# Altium PCB ZB.PcbDoc
Units mil, origin at the board's own origin, x right, y up, seen from the top; angles counter-clockwise.
Board outline 4491 x 3636 mil, 2 copper layers (Top Layer, Bottom Layer); 40 components, 58 nets, 193 pads, 17 vias.
Unrouted connection lines stored in the file: 4.
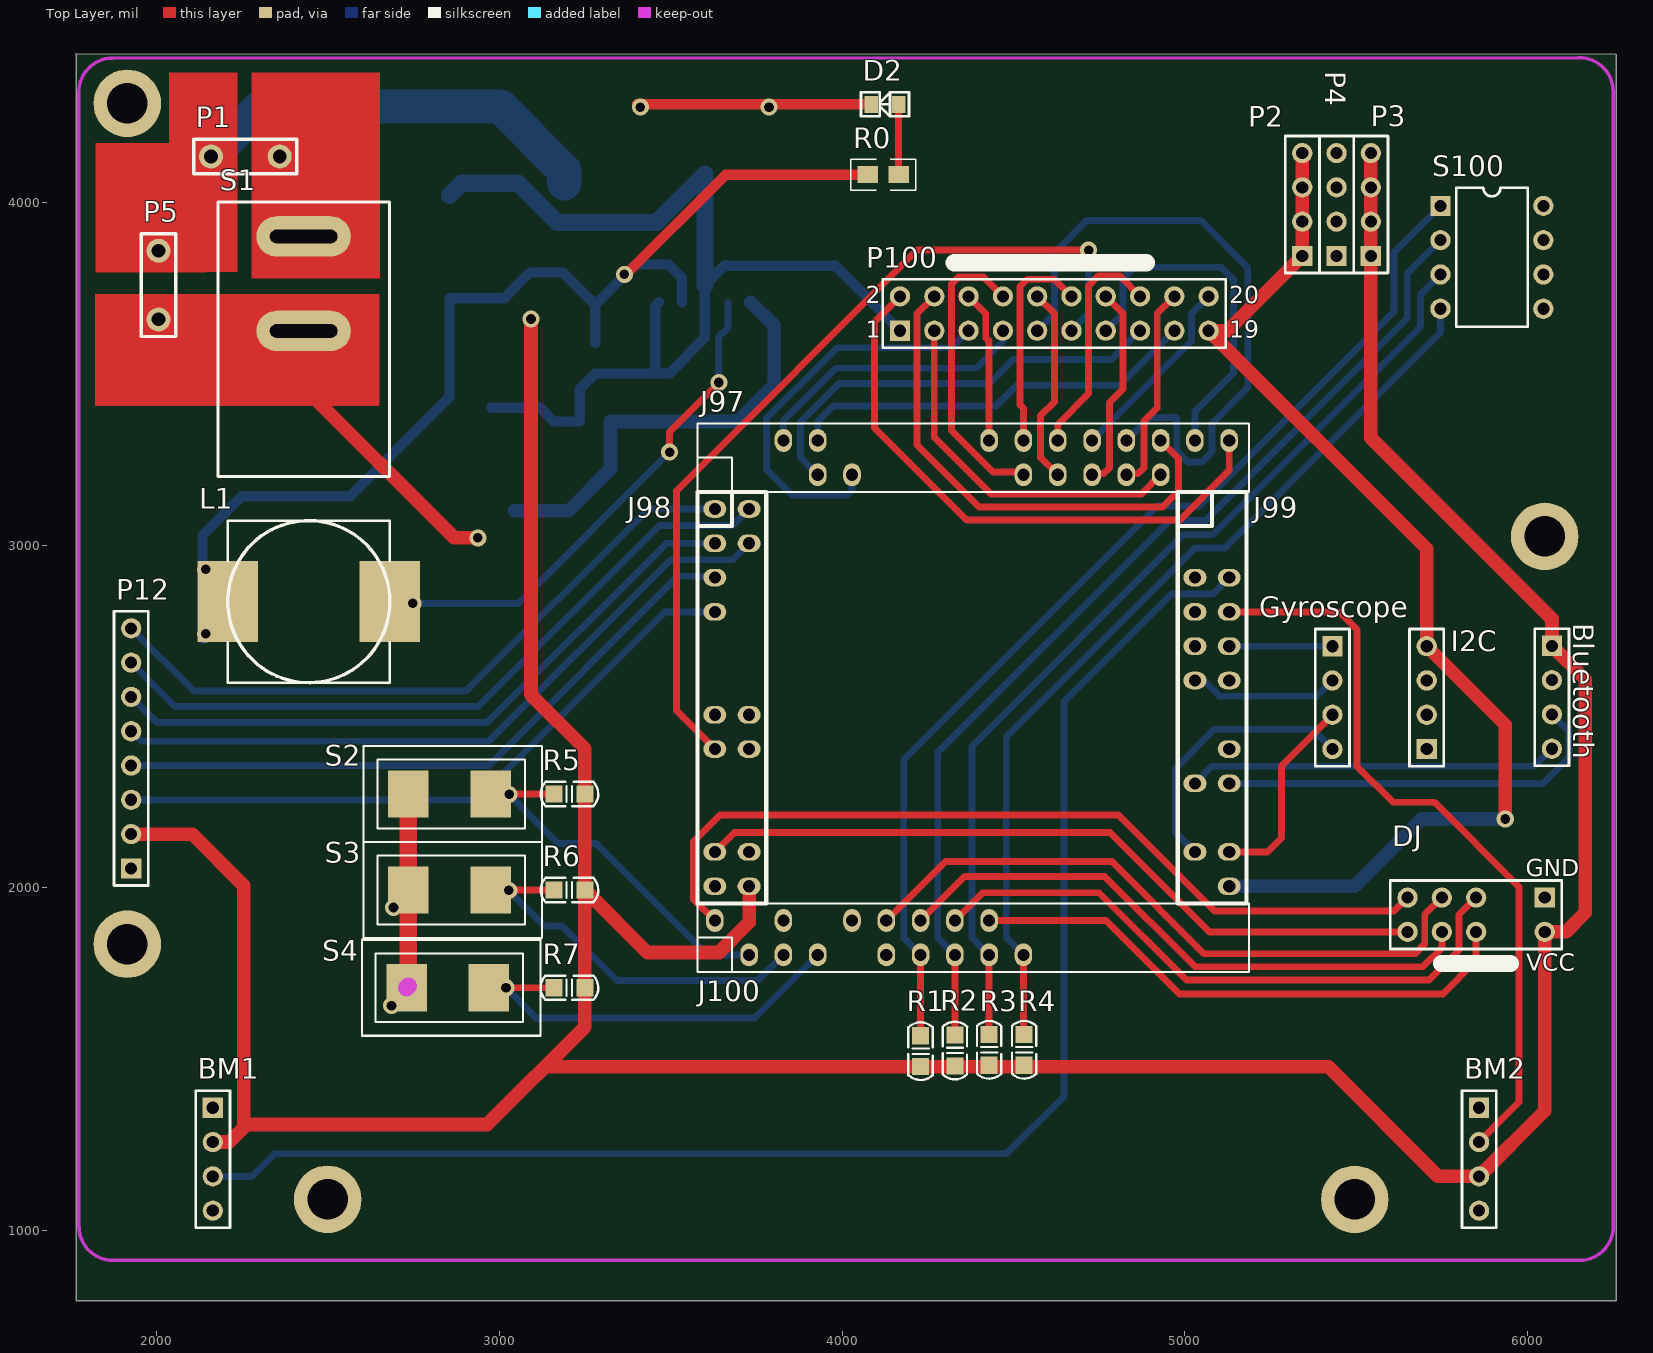
[diagram p0: Top Layer view]
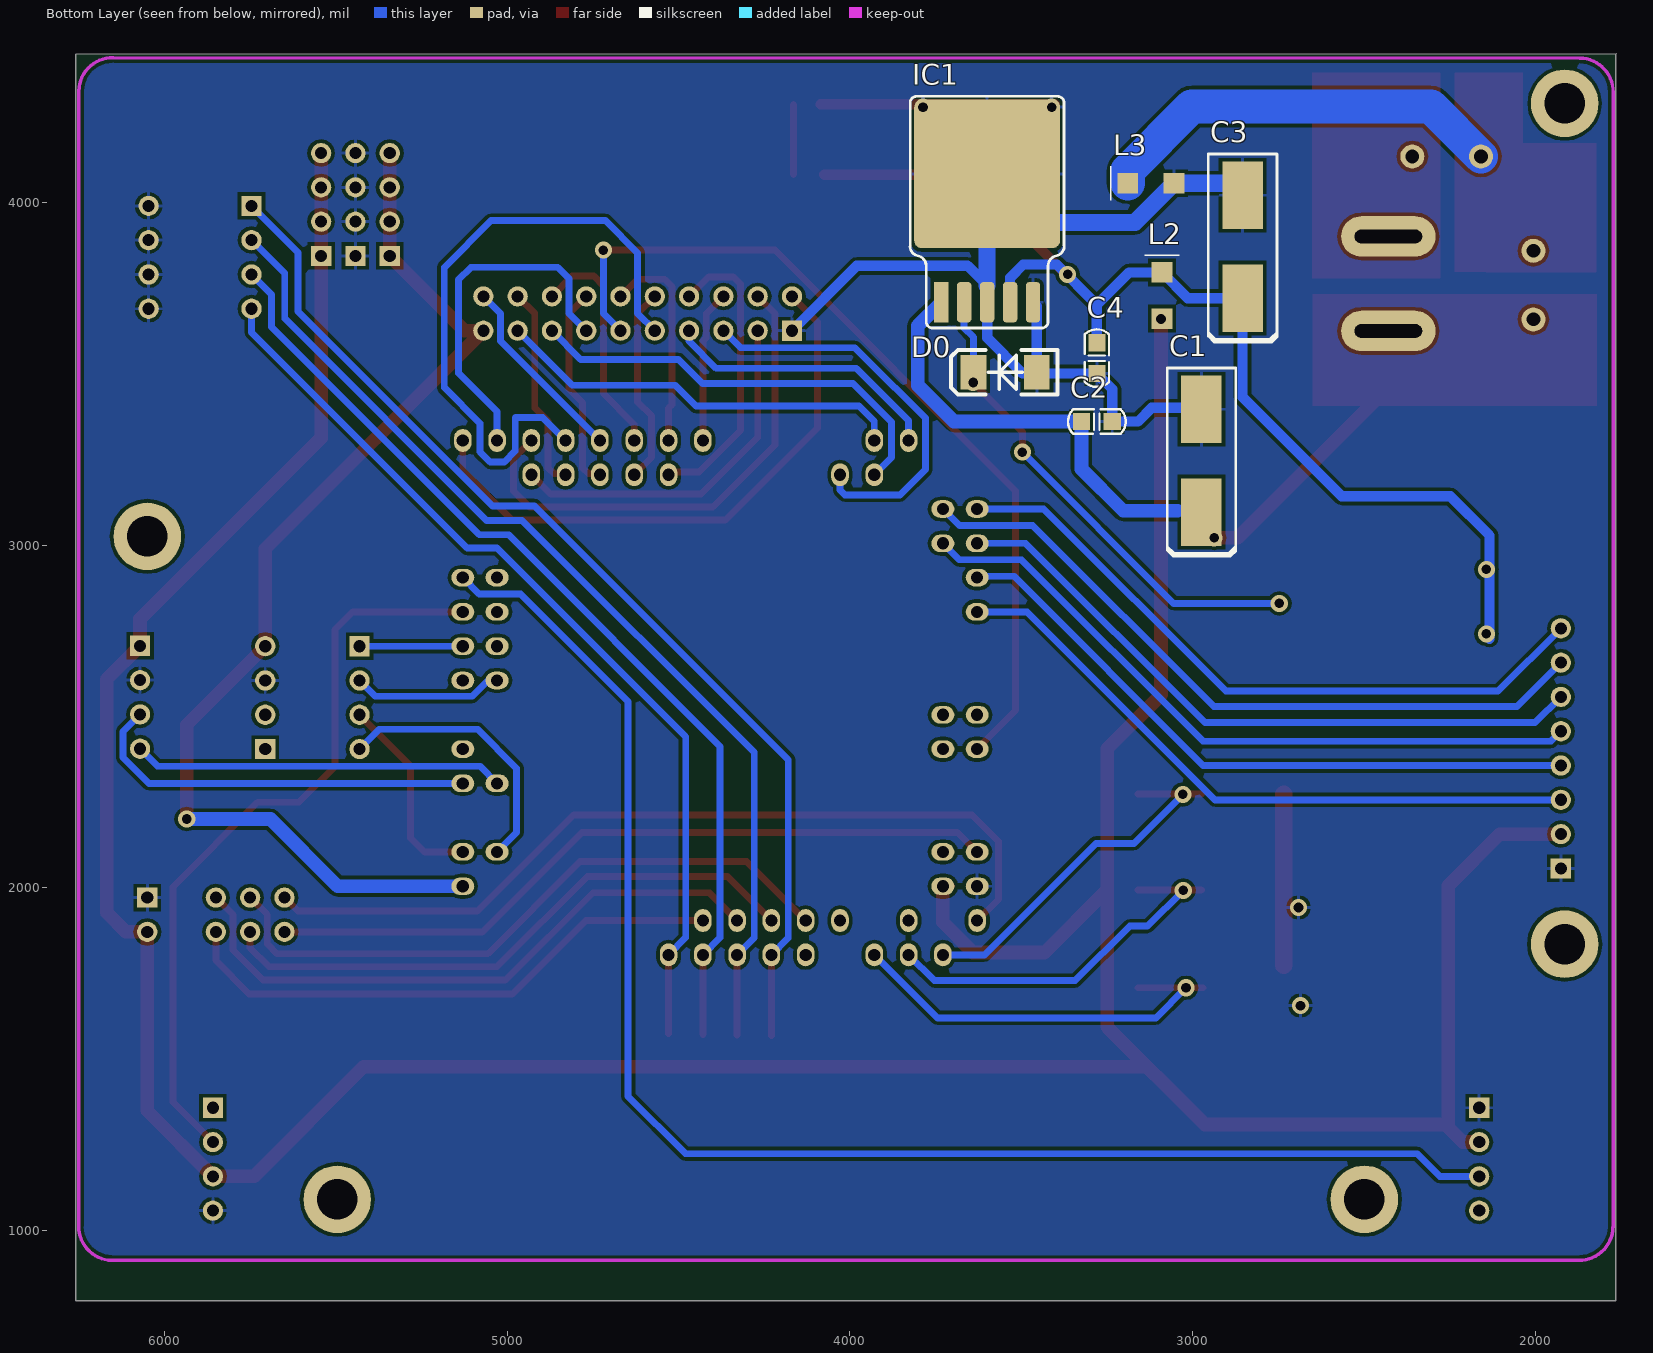
[diagram p1: Bottom Layer view, seen from below]

## Layer stack, top to bottom
Top Layer: signal copper 1.4
Dielectric: dielectric 12.6, FR-4, Dk 4.8
Bottom Layer: signal copper 1.4

## Board outline
1766,4432 1767,4431 1767,796 6257,796 6257,4431

## Design rules (kind name [scope] priority, off if disabled: settings)
Clearance [All] p1: gap=10
ComponentClearance [All] p1: gap=10 collisioncheckmode=3 verticalgap=10
PolygonConnect [All] p1: connectstyle=Relief reliefconductorwidth=10 reliefentries=4 polygonreliefangle="90 Angle"
RoutingVias [All] p1: holewidth=28 width=50 viastyle="Through Hole" minholewidth=28 minwidth=50 maxholewidth=118.11 maxwidth=236.22
SolderMaskExpansion [All] p1: expansion=4
TestPointUsage [All] p1: valid=0 allowmultiple=FALSE
Testpoint [All] p1: side=15 testpointundercomponent=TRUE minsize=40 maxsize=100 preferedsize=60 minholesize=0 maxholesize=40 preferedholesize=32 testpointgrid=1 style=1023 order=0123456789
Width [All] p1: maxlimit=100 minlimit=10 preferedwidth=20
18 further rules are at their usual default settings.

## Components (designator, comment, footprint, x,y, rotation, side; value= is the part's Value field where it differs from the comment)
Bluetooth "Header 4" HDR1X4 6070,2706 r270 top
BM1 "Header 4" HDR1X4 2165.03,1359 r270 top
BM2 "Header 4" HDR1X4 5857.64,1359 r270 top
C1 "470" ccc 2975,3096 r90 bottom
C2 "" C0805 3325,3360 r180 bottom
C3 "470" ccc 2855,3720 r90 bottom
C4 "" C0805 3280,3590 r270 bottom
D0 "D Zener" D1810 3455,3504 r0 bottom
D2 "LED2" D0805 4165,4285 r180 top
DJ "Header 5X2" HDR2X5 6049,1972 r180 top
Gyroscope "Header 4" HDR1X4 5430,2705 r270 top
I2C "Header 4" HDR1X4 5705,2405 r90 top
IC1 "LM2596-05" TO-263-5 3600,3895 r180 bottom
J97 "CON_16X2_PIN_FIRE" CON-16X2-2.54#1 3629,3205 r0 top
J98 "CON_12X2_PIN_FIRE_" CON-12X2-2.54#1 3629,3105 r270 top
J99 "CON_12X2_PIN_FIRE_" CON-12X2-2.54#2 5029,3105 r270 top
J100 "CON_16X2_PIN_FIRE" CON-16X2-2.54#2 3629,1805 r0 top
L1 "Inductor" L-12*12MM-S 2445,2835 r180 top
L2 "Inductor" L1206 3090,3795 r270 bottom
L3 "Inductor" L1206 3190,4055 r180 bottom
P1 "Header 2" SIP2-1 2360,4133 r180 top
P2 "Header 4" HDR1X4 5342,3843 r90 top
P3 "Header 4" HDR1X4 5542,3843 r90 top
P4 "Header 4" HDR1X4 5442,3843 r90 top
P5 "Header 2" SIP2-1 2007,3658 r90 top
P12 "Header 8" HDR1X8 1927,2057 r90 top
P100 "Header 10X2" HDR2X10 4169,3625 r0 top
R0 "Res2" R0805 4075,4080 r0 top
R1 "Res2" C0805 4229,1479 r90 top
R2 "Res2" C0805 4329,1481 r90 top
R3 "Res2" C0805 4429,1483 r90 top
R4 "Res2" C0805 4531,1483 r90 top
R5 "Res2" C0805 3250,2274 r180 top
R6 "Res2" C0805 3250,1994 r180 top
R7 "Res2" C0805 3250,1709 r180 top
S1 "SW-SPST" PCBComponent_1 2430,3900 r270 top
S2 "SW-PB" 白色按键 2975,2264 r180 top
S3 "SW-PB" 白色按键 2975,1984 r180 top
S4 "SW-PB" 白色按键 2970,1699 r180 top
S100 "SW-DIP4" DIP-8 5895,3839 r270 top

## Footprints (in the part's own frame and the unit in brackets; to place one, negate y for a bottom-side part, rotate by r counter-clockwise, add the part's x,y. Pads: shape width x height; smd on the part's side, far side on the other; paste and mask are expansions set on the pad)
C0805 [mil]
  rect 50x50 smd: 1(0,0) 2(90,0)
  silkscreen extent -39,-36 129,36, body extent 6,-24 85,23, height 47
ccc [mm]
  rect 5x3 smd: 1(0,0) 2(7.62,0)
  silkscreen extent -3.25,-2.54 10.67,2.54
CON-12X2-2.54#1 [mm]
  oval 1.3x1.7 hole 0.9: 1(0,0) 2(0,2.54) 3(2.54,0) 4(2.54,2.54) 5(5.08,0) 7(7.62,0) 13(15.24,0) 14(15.24,2.54) 15(17.78,0) 16(17.78,2.54) 21(25.4,0) 22(25.4,2.54) 23(27.94,0) 24(27.94,2.54)
  silkscreen extent -1.27,-1.27 29.21,3.81
CON-12X2-2.54#2 [mm]
  oval 1.3x1.7 hole 0.9: 5(5.08,0) 6(5.08,2.54) 7(7.62,0) 8(7.62,2.54) 9(10.16,0) 10(10.16,2.54) 11(12.7,0) 12(12.7,2.54) 16(17.78,2.54) 17(20.32,0) 18(20.32,2.54) 21(25.4,0) 22(25.4,2.54) 24(27.94,2.54)
  silkscreen extent -1.27,-1.27 29.21,3.81
CON-16X2-2.54#1 [mm]
  oval 1.3x1.7 hole 0.9: 6(5.08,2.54) 7(7.62,0) 8(7.62,2.54) 9(10.16,0) 18(20.32,2.54) 19(22.86,0) 20(22.86,2.54) 21(25.4,0) 22(25.4,2.54) 23(27.94,0) 24(27.94,2.54) 25(30.48,0) 26(30.48,2.54) 27(33.02,0) 28(33.02,2.54) 30(35.56,2.54) 32(38.1,2.54)
  silkscreen extent -1.27,-1.27 39.55,3.81
CON-16X2-2.54#2 [mm]
  oval 1.3x1.7 hole 0.9: 2(0,2.54) 3(2.54,0) 5(5.08,0) 6(5.08,2.54) 7(7.62,0) 10(10.16,2.54) 11(12.7,0) 12(12.7,2.54) 13(15.24,0) 14(15.24,2.54) 15(17.78,0) 16(17.78,2.54) 17(20.32,0) 18(20.32,2.54) 19(22.86,0)
  silkscreen extent -1.27,-1.27 39.55,3.81
D0805 [mil]
  rect 40x50 smd: 1(0,0) 2(80,0)
  silkscreen extent -30,-35 110,35, body extent 0,-17 81,19, height 33
D1810 [mil]
  rect 75x100 smd: 1(0,0) 2(185,0)
  silkscreen extent -60,-65 250,65, body extent -18,-76 202,78, height 98
DIP-8 [mm] "DIP; 8 Leads; Row Spacing 7.62 mm; Pitch 2.54 mm"
  rect 1.5x1.5 hole 0.9: 1(-3.81,-3.81)
  round 1.5 hole 0.9: 2(-1.27,-3.81) 3(1.27,-3.81) 4(3.81,-3.81) 5(3.81,3.81) 6(1.27,3.81) 7(-1.27,3.81) 8(-3.81,3.81)
  silkscreen extent -5.15,-2.65 5.15,2.65
HDR1X4 [mm] "Connector; Header; 4 Position"
  rect 1.5x1.5 hole 0.9: 1(0,0)
  round 1.5 hole 0.9: 2(2.54,0) 3(5.08,0) 4(7.62,0)
  silkscreen extent -1.27,-1.27 8.89,1.27
HDR1X8 [mm] "Connector; Header; 8 Position"
  rect 1.5x1.5 hole 0.9: 1(0,0)
  round 1.5 hole 0.9: 2(2.54,0) 3(5.08,0) 4(7.62,0) 5(10.16,0) 6(12.7,0) 7(15.24,0) 8(17.78,0)
  silkscreen extent -1.27,-1.27 19.05,1.27
HDR2X5 [mm] "Connector; Header; 5x2 Position"
  rect 1.5x1.5 hole 0.9: 1(0,0)
  round 1.5 hole 0.9: 2(0,2.54) 5(5.08,0) 6(5.08,2.54) 7(7.62,0) 8(7.62,2.54) 9(10.16,0) 10(10.16,2.54)
  silkscreen extent -1.27,-1.27 11.43,3.81
HDR2X10 [mm] "Connector; Header; 10x2 Position"
  rect 1.5x1.5 hole 0.9: 1(0,0)
  round 1.5 hole 0.9: 2(0,2.54) 3(2.54,0) 4(2.54,2.54) 5(5.08,0) 6(5.08,2.54) 7(7.62,0) 8(7.62,2.54) 9(10.16,0) 10(10.16,2.54) 11(12.7,0) 12(12.7,2.54) 13(15.24,0) 14(15.24,2.54) 15(17.78,0) 16(17.78,2.54) 17(20.32,0) 18(20.32,2.54) 19(22.86,0) 20(22.86,2.54)
  silkscreen extent -1.27,-1.27 24.13,3.81
L1206 [mil]
  rect 60x60 smd: 1(0,0) 2(135,0)
  silkscreen extent -50,-50 -50,50, body extent 5,-32 131,31, height 43
L-12*12MM-S [mm]
  rect 4.5x6 smd: 1(-6,0) 2(6,0)
  silkscreen extent -6,-6 6,6, body extent -6.05,-5.94 5.95,6.06, height 8
PCBComponent_1 [mm]
  oval 3x7 hole 1 slot 5 at 90 deg: 1(0,0) 2(7,0)
  silkscreen extent -2.54,-6.35 17.78,6.35
R0805 [mil]
  rect 60x50 smd: 1(0,0) 2(90,0)
  silkscreen extent -50,-45 140,45, body extent 6,-25 85,25, height 22
SIP2-1 [mil]
  round 70 hole 40: 1(0,0) 2(200,0)
  silkscreen extent -50,-50 250,50
TO-263-5 [mm]
  rect 1.07x3 smd: 1(-3.4,-4.75)
  rrect50% 1.07x3 smd: 2(-1.7,-4.75) 3(0,-4.75) 4(1.7,-4.75) 5(3.4,-4.75)
  rrect10% 10.8x11 smd: 3(0,4.75)
  silkscreen extent -5.7,-6.66 5.7,10.5, body extent -5.14,-4.8 5.09,9.55, height 4.48
白色按键 [mm]
  rect 3x3.5 smd: 1(0,-0.254) 2(6.096,-0.254)
  silkscreen extent -3.81,-3.81 9.4,3.3

## Part data
Bluetooth BM1 BM2 Gyroscope I2C P2 P3 P4: "Header, 4-Pin"
C1 C2 C3 C4: library part "Cap Pol2", "Polarized Capacitor (Axial)"
D0: "Zener Diode"
D2: "Typical RED, GREEN, YELLOW, AMBER GaAs LED"
DJ: "Header, 5-Pin, Dual row"
J97 J100: "16X2,pin,2.54mm"
J98 J99: "12X2,pin,2.54mm"
P1 P5: "Header, 2-Pin"
P12: "Header, 8-Pin"
P100: "Header, 10-Pin, Dual row"
R0 R1 R2 R3 R4 R5 R6 R7: "Resistor"
S1: "Single-Pole, Single-Throw Switch"
S2 S3 S4: "Switch"
S100: "DIP Switch"

## Free pads (board coordinates)
  round 196.85 hole 118.11: 0(6049,3025) 1(1915.71,1836) 2(1915.71,4288.03) 3(2500,1092) 4(5495,1091.76)

## Via types
v1: diameter 50, hole 28, Top Layer to Bottom Layer, 17 vias

## Nets (pads, with @x,y where several pads share a name; then routed paths per layer and width w, separated by ;. In a path a pad name is that pad's centre, name@x,y a point inside that pad or via, vN(x,y) a via of type N, cw(c..) or ccw(c..) an arc to the next point about the centre after c; other vN are vias at no path point)
3.3V: I2C.4 J99.24 P2.1 P2.2 P2.3 P2.4 P100.19 | length 3331.8
  Top Layer w40: P2.4 P2.1 5124,3625 P100.19 5705,2989 I2C.4 5934,2476 v1(5934,2201)
  Bottom Layer w40: J99.24 5494,2005 5690,2201 v1(5934,2201)
5V: Bluetooth.1 BM1.2 BM2.3 DJ.2 J98.24 L2.2 P3.1 P3.2 P3.3 P3.4 P12.2 R1.1 R2.1 R3.1 R4.1 R5.1 R6.1 R7.1 | length 11433.7
  Top Layer w20: J98.24@3704,2005 J98.24
  Top Layer w40: P12.2 2105,2157 2255,2007 2255,1301 ; BM1.2 2213,1259 2264,1310 2965,1310 3250,1595 3250,2406 3093,2563 v1(3093,3659) ; 3134,1479 5418,1479 5738,1159 BM2.3 6049,1350.36 DJ.2 6111,1872 6167,1928 6167,2609 Bluetooth.1 6070,2784 5542,3312 P3.4 ; R6.1 3432,1812 3641,1812 3729,1900 J98.24
AD4: Gyroscope.4 J99.21 | length 796.9
  Bottom Layer w20: J99.21 4972,2162 4972,2349 5086,2463 5372,2463 Gyroscope.4
AD5: Gyroscope.3 J99.22 | length 589.7
  Top Layer w20: J99.22 5240,2105 5281,2146 5281,2356 Gyroscope.3
AD6: Gyroscope.2 J99.11 | length 439.1
  Bottom Layer w20: J99.11 5056,2605 5102,2559 5384,2559 Gyroscope.2
AD7: Gyroscope.1 J99.10 | length 301
  Bottom Layer w20: J99.10 Gyroscope.1
DGND: Bluetooth.2 BM1.1 BM2.4 C1.2 C2.2 C3.2 C4.2 D0.1 D2.2 DJ.1 I2C.3 IC1.3 IC1.5 J98.23 L3.2 P4.1 P4.2 P4.3 P4.4 P12.1 P100.1 S2.2 S3.2 S4.2 S100.5 S100.6 S100.7 S100.8 | length 4208.6
  Top Layer w30: v1@3402,4285 D2.2
  Top Layer w50: S4.2@2735,1774 S2.2
  Bottom Layer w30: C1.2@2976,3400 3120,3400 3160,3360 C2.2 3235,3455 C4.2 3496,3500 3600,3604 3600,3757 3657,3814 3980,3814 P100.1 ; D0.1@3451,3500 D0.1 3455,3696.85 IC1.5
  Bottom Layer w50: C3.2 2890,4055 L3.2 3169,3941 3458.99,3941 3600,4082.01 IC1.3@3600,3757
  other v1: 2686,1657 2692,1943 3412,4277 3787,4277
DVCC: C1.1 C2.1 IC1.1 P5.1 S1.2 | length 2114.5
  Top Layer w40: S1.2 2430,3460 2867,3023 2869,3021 v1(2938,3021)
  Bottom Layer w40: 3045,3100 3203,3100 3325,3222 C2.1 3697,3360 3802,3465 3802,3639.85 IC1.1
GND: L3.1 P1.2 P5.2 | length 1204.9
  Bottom Layer w100: P1.2 2306,4279 3003,4279 3190,4092 L3.1
K1: J100.13 R1.2 S100.1 | length 3168
  Top Layer w20: R1.2 J100.13@4229,1813
  Bottom Layer w20: J100.13 4180,1854 4180,2374 4920,3114 5042,3114 5609,3681 5609,3853 S100.1
K2: J100.15 R2.2 S100.2 | length 3006.9
  Top Layer w20: R2.2 J100.15
  Bottom Layer w20: J100.15 4279,1855 4279,2395 4956,3072 5060,3072 5648,3660 5648,3792 S100.2
K3: J100.17 R3.2 S100.3 | length 2852.3
  Top Layer w20: R3.2 J100.17
  Bottom Layer w20: J100.17 4379,1855 4379,2413 4996,3030 5081,3030 5687,3636 5687,3731 S100.3
K4: J100.19 R4.2 S100.4 | length 2710.1
  Top Layer w20: R4.2@4529,1575 J100.19
  Bottom Layer w20: J100.19 4479,1855 4479,2441 5029,2991 5116,2991 5745,3620 S100.4
L1: BM1.3 J99.6 | length 4362
  Bottom Layer w20: BM1.3 2280,1159 2346,1225 4480,1225 4647,1392 4647,2544 4960,2857 5081,2857 J99.6
L2: BM1.4 J99.5
NetC3_1: C3.1 C4.1 IC1.4 L1.2 L2.1 R0.1 | length 3306.2
  Top Layer w30: v1@3364,3783 3661,4080 R0.1
  Bottom Layer w30: v1@2135,2727 2135,3028 2249,3142 2566,3142 2855,3431 C3.1 3015,3720 L2.1 3186,3795 3280,3701 ; C4.1 3280,3701 ; IC1.4 3533.07,3779.93 3495,3818 3397,3818 3280,3701
  other v1: 2144,2741 2144,2929 3365.09,3789.09
NetD0_2: D0.2 IC1.2 L1.1 | length 1409.5
  Top Layer w20: v1(3497,3271) 3497,3330 v1(3641,3474)
  Bottom Layer w20: v1(2748,2830) 3056,2830 v1(3497,3271) ; D0.2 3640,3567 3640,3606 3666.93,3632.93 IC1.2
NetD2_1: D2.1 R0.2 | length 205
  Top Layer w20: R0.2 D2.1
P0: J98.1 P12.8 | length 1997.7
  Bottom Layer w20: P12.8 2110,2574 2904,2574 3435,3105 J98.1
P1: J98.2 P12.7 | length 2101.6
  Bottom Layer w20: P12.7 2055,2529 2939,2529 3467,3057 3681,3057 J98.2 J98.2@3721,3105
P2: J98.3 P12.6 | length 1949.7
  Bottom Layer w20: P12.6 2002,2482 2965,2482 3488,3005 J98.3
P3: J98.4 P12.5 | length 2053
  Bottom Layer w20: P12.5 1956,2428 2971,2428 3500,2957 3681,2957 J98.4
P4: J98.5 P12.4 | length 1932.3
  Bottom Layer w20: P12.4 2970,2357 3522,2909 3625,2909 J98.5
P5: J98.7 P12.3 | length 1929
  Bottom Layer w20: P12.3 2935,2257 3483,2805 J98.7
PB1: J100.3 R5.2 S2.1 | length 1078.9
  Top Layer w20: S2.1 R5.2
  Bottom Layer w20: v1(3029,2273) 3172,2130 3283,2130 3608,1805 J100.3
PB2: J100.5 R6.2 S3.1 | length 1126
  Top Layer w20: S3.1 R6.2
  Bottom Layer w20: v1(3028,1993) 3132,1889 3184,1889 3343,1730 3754,1730 J100.5
PB3: J100.7 R7.2 S4.1 | length 1211.7
  Top Layer w20: S4.1 R7.2
  Bottom Layer w20: v1(3020,1709) 3108,1621 3745,1621 J100.7
PH0: DJ.7 J100.12 | length 1921
  Top Layer w20: J100.12 4301,2077 4787,2077 5056,1808 5671,1808 5699,1836 5699,1922 DJ.7
PH1: DJ.8 J100.14 | length 1751.2
  Top Layer w20: J100.14 4357,2033 4766,2033 5028.71,1770.29 5693.71,1770.29 5749,1825.57 DJ.8
PH2: DJ.5 J100.16 | length 1818.5
  Top Layer w20: J100.16 4410,1986 4750,1986 5004,1732 5712,1732 5799,1819 5799,1922 DJ.5
PH3: DJ.6 J100.18 | length 1632.8
  Top Layer w20: J100.18 4770,1905 4984,1691 5752,1691 5849,1788 DJ.6
PP5: DJ.10 J98.21 | length 2171.7
  Top Layer w20: J98.21 3686,2162 4781,2162 5071,1872 DJ.10
  Bottom Layer w20: J98.21 J98.21@3637,2105
PP7: DJ.9 J100.2 | length 2502.7
  Top Layer w20: J100.2 3567,1967 3567,2136 3644,2213 4806,2213 5086,1933 5610,1933 DJ.9
PS0: Bluetooth.3 J99.18 | length 1168.1
  Bottom Layer w20: J99.18 6044.53,2305 6119.53,2380 6119.53,2456.47 Bluetooth.3
PS1: Bluetooth.4 J99.17 | length 1082.8
  Bottom Layer w20: J99.17 5079,2355 6019,2355 Bluetooth.4
PTA25: J97.32 P100.2 | length 1707.3
  Top Layer w20: P100.2 4095,3651 4095,3341 4363,3073 4985,3073 5129,3217 J97.32
PTA26: J97.28 P100.4 | length 1486.7
  Top Layer w20: P100.4 4219,3675 4219,3292 4400,3111 4934,3111 4981,3158 4981,3253 J97.28 J97.28@4929,3297
PTA27: J97.30 P100.13 | length 1038.7
  Bottom Layer w20: P100.13 4819,3675 4819,3777 4852,3810 5105,3810 5141,3774 5141,3501 5029,3389 J97.30
PTA28: J97.27 P100.3 | length 1062.5
  Top Layer w20: P100.3 4269,3314 4434,3149 4873,3149 J97.27
PTA29: J97.26 P100.9 | length 1888.9
  Bottom Layer w20: P100.9 4619,3675 4619,3852 4713,3946 5047,3946 5183,3810 5183,3459 5079,3355 5079,3272 5049,3242 5008,3242 4976,3274 4976,3371 4975,3372 4896,3372 J97.26
PTB0: J97.24 P100.20 | length 560.8
  Bottom Layer w20: J97.24 5019,3595 5019,3675 P100.20
PTB1: J97.25 P100.18 | length 597.9
  Top Layer w20: J97.25 4829,3208 4863,3208 4880,3225 4880,3361 4919,3400 4919,3675 P100.18
PTB2: J97.22 P100.16 | length 674.3
  Top Layer w20: J97.22 4629,3352 4719,3442 4719,3756 4747,3784 4810,3784 P100.16
PTB3: J97.23 P100.14 | length 597.9
  Top Layer w20: J97.23 4729,3208 4763,3208 4780,3225 4780,3416 4819,3455 4819,3675 P100.14
PTB4: J97.20 P100.12 | length 632.6
  Top Layer w20: J97.20 4529,3399 4519,3409 4519,3754 4540,3775 4619,3775 P100.12
PTB5: J97.21 P100.10 | length 578
  Top Layer w20: P100.10 4619,3675 4619,3417 4579,3377 4579,3255 J97.21
PTB6: J97.19 P100.8 | length 877.4
  Top Layer w20: P100.8 4412,3782 4340,3782 4319,3761 4319,3334 4440,3213 4529,3213 J97.19
PTB7: J97.18 P100.6 | length 444.9
  Top Layer w20: P100.6 4419,3675 4419,3605 4429,3595 J97.18
PTB20: J97.8 P100.17 | length 1204.8
  Bottom Layer w20: J97.8 3929,3360 3974,3405 4449.01,3405 4509.97,3465.96 4809.96,3465.96 P100.17
PTB21: J97.9 P100.5 | length 1175.1
  Bottom Layer w20: J97.9 4029,3160 4015,3146 3854,3146 3780,3220 3780,3370 3869.22,3459.22 3869.79,3459.22 3986.05,3575.47 4319.47,3575.47 P100.5
PTB22: J97.6 P100.7 | length 824.4
  Bottom Layer w20: J97.6 3829,3363 3981.47,3515.47 4390,3515.47 4469,3594.47 P100.7
PTB23: J97.7 P100.15 | length 1274.9
  Bottom Layer w20: J97.7 3879,3255 3879,3359 3991,3471 4430,3471 4500,3541 4785,3541 P100.15
PTD0: J98.15 P100.11 | length 2555.9
  Top Layer w20: J98.15 3517,2517 3517,3158 4219,3860 v1(4719,3860)
  Bottom Layer w20: J98.15 J98.15@3637,2405 ; P100.11 4719,3675 v1(4719,3860)
R1: BM2.2 J99.8 | length 2203.1
  Top Layer w20: J99.8 5450,2805 5502,2753 5502,2354 5606,2250 5727,2250 5974,2003 5974,1375.36 BM2.2
R2: BM2.1 J99.7
SCL: I2C.2 J100.11
SDA: I2C.1 J100.10
VCC: P1.1 S1.1
pads on no net: J98.13 J98.14 J98.16 J98.22 J99.9 J99.12 J99.16 J100.6

## Polygon pours and split planes (outlines as drawn)
DGND on Bottom Layer "Keep-Out Layer-No Net" (solid, remove dead copper): 1707,4503 1713,4497 1713,865 6669,865 6775,971 6786,982 6786,4473

## Keep-outs
Top Layer:
  lines w50: 2730,1709 2735,1714
Keep-Out Layer:
  lines w10: 1774.43,4320.06 cw(c1872.93,4321.56) 1871.43,4420.06 ; 1774.71,1011 1774.71,1792.71 1774.71,4321 ; 1775,1011 ccw(c1873.5,1012.5) 1875,914 6151.43,914 ; 1871.71,4420.03 6148.71,4421.38 ; 6148.71,4421 cw(c6150.21,4322.5) 6248.71,4324 ; 6152,914 ccw(c6150.5,1012.5) 6249,1014 ; 6248.43,1014 6248.43,4324.38

## Other copper
Top Layer:
  rectangle net GND: 2038,3796 2237,4378
  rectangle net GND: 1823,3795 2147,4172
  rectangle net DVCC: 1821,3406 2651,3732
  region net VCC: 2652,3777 2652,4378 2278,4378 2278,3777

## Silkscreen, mask and mechanical layers (free items; w line width, h text height)
Top Overlay:
  lines w50: 4327,3823 4888,3823 ; 5748,1780 5949,1780
Top Solder:
  rectangle: 2038,4150 2238,4379
  rectangle: 1823,3795 2238,4173
  rectangle: 1820,3407 2652,3732
  rectangle: 2278,3777 2653,4378

## Text inside footprints (layer, text, board x,y; h text height)
DJ: Top Overlay "GND" at 5993,2034 h50; Top Overlay "VCC" at 5995,1758 h50
P100: Top Overlay "20" at 5129,3705 h50; Top Overlay "19" at 5129,3605 h50; Top Overlay "1" at 4069,3605 h50; Top Overlay "2" at 4069,3705 h50